# Altium PCB PCB3.PcbDoc
Units mil, origin at the board's own origin, x right, y up, seen from the top; angles counter-clockwise.
Board outline 6000 x 4000 mil, 2 copper layers (Top Layer, Bottom Layer); 76 components, 0 nets, 210 pads, 0 vias.
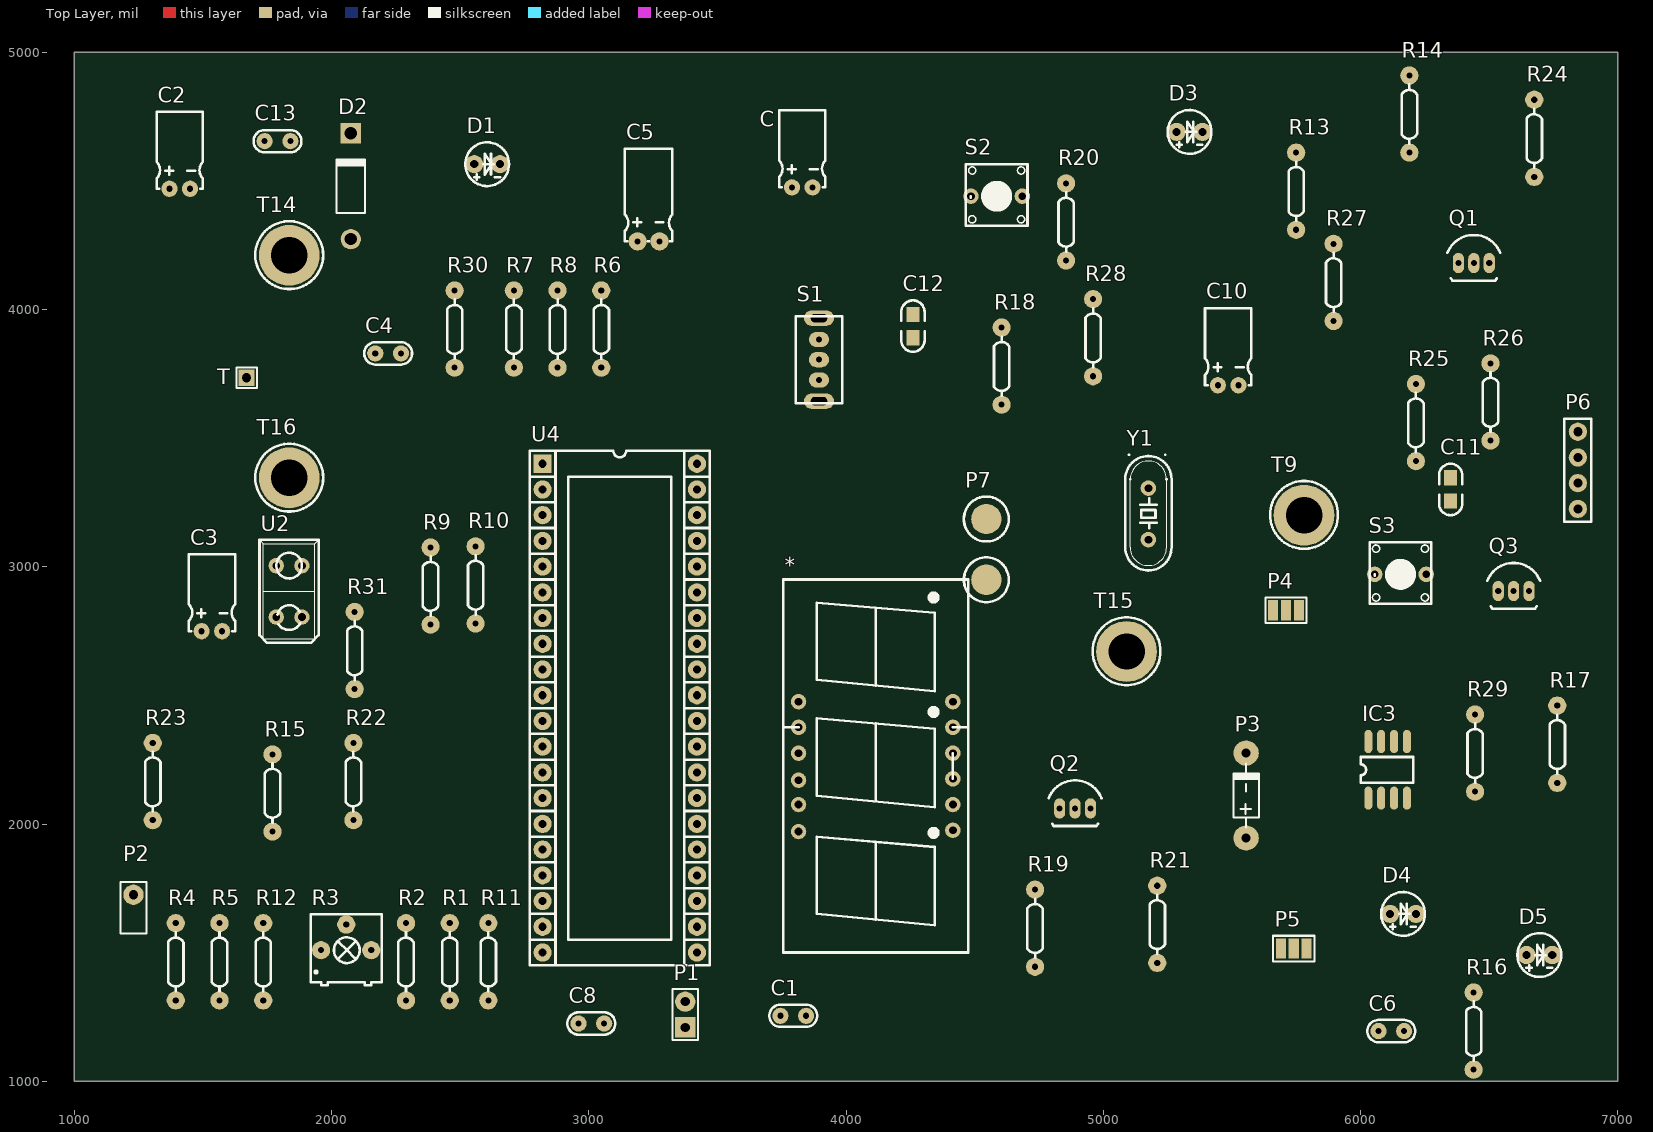
[diagram p0: Top Layer view]
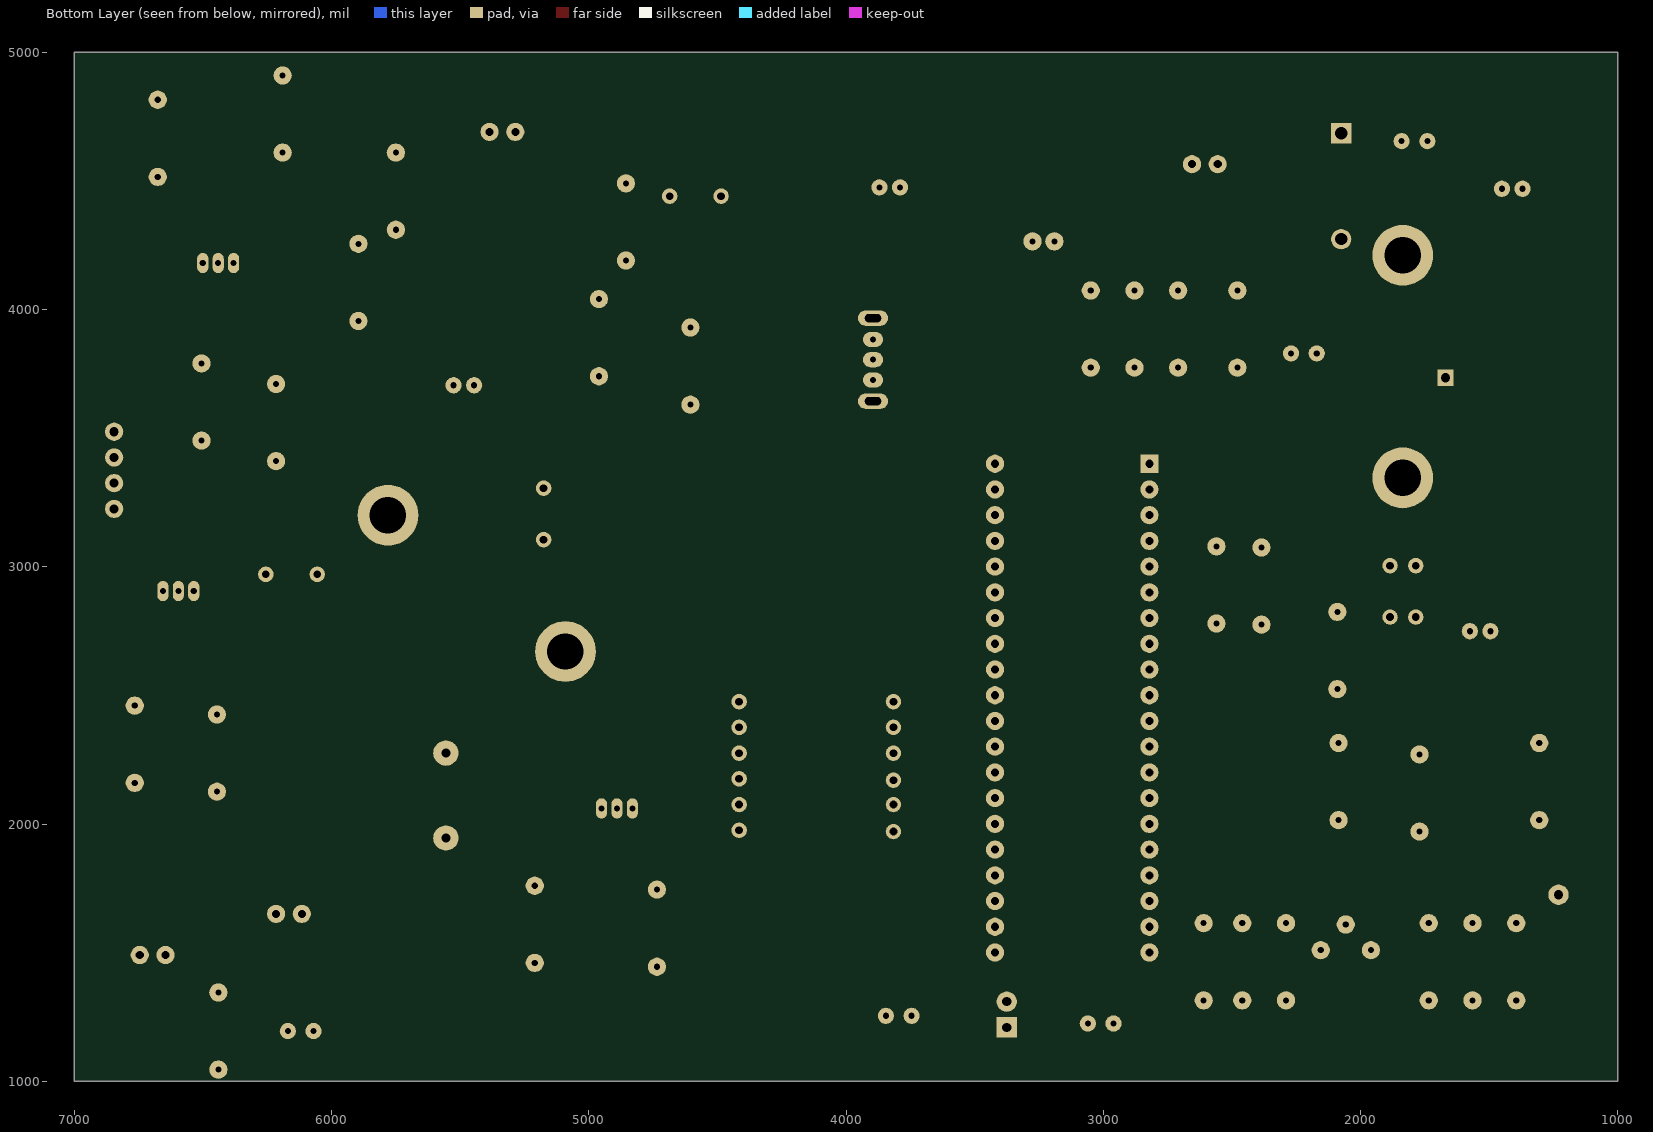
[diagram p1: Bottom Layer view, seen from below]

## Layer stack, top to bottom
Top Solder: solder mask 0.4, Solder Resist, Dk 3.5
Top Layer: signal copper 1.4
Dielectric 1: dielectric 12.6, FR-4, Dk 4.8
Bottom Layer: signal copper 1.4
Bottom Solder: solder mask 0.4, Solder Resist, Dk 3.5

## Board outline
1000,1000 7000,1000 7000,5000 1000,5000

## Design rules (kind name [scope] priority, off if disabled: settings)
Clearance [All] p1: gap=10 ignorepadtopadclearanceinfootprint=FALSE except(0: Arc-Hole Track-Hole SMDPad-Hole THPad-Hole Via-Hole Fill-Hole Poly-Hole Region-Hole Text-Hole)
PolygonConnect [All] p1: connectstyle=Relief reliefconductorwidth=10 reliefentries=4 polygonreliefangle="90 Angle" airgapwidth=10
RoomDefinition Sheet2 [InComponentClass('Sheet2')] p1: confinementstyle=ConfineIn formatcopy=TRUE lockcomponents=FALSE outline 7050.57,990.57 25795.57,990.57 25795.57,3110.57 7050.57,3110.57
RoutingVias [All] p1: holewidth=28 width=50 viastyle="Through Hole" minholewidth=28 minwidth=50 maxholewidth=28 maxwidth=50
SolderMaskExpansion [All] p1: expansion=4 istentingtop=FALSE
Width [All] p1: maxlimit=10 minlimit=10 preferedwidth=10
30 further rules are at their usual default settings.

## Components (designator, comment, footprint, x,y, rotation, side; value= is the part's Value field where it differs from the comment)
* "tt" smg 4355.57,2220.57 r90 top
C "Cap Pol1" cd-0.1t 3790,4475 r90 top value=10uF
C1 "Cap" C-0.1#1 3745,1254.43 r0 top value=30pF
C2 "Cap Pol1" cd-0.1t 1370,4469.43 r90 top value=0.47uF
C3 "Cap Pol1" cd-0.1t 1495,2749.43 r90 top value=0.47uF
C4 "Cap" C-0.1#1 2170,3829.43 r0 top value=104
C5 "Cap Pol1" CD-0.2T 3190,4265 r90 top value=100uF
C6 "Cap" C-0.1#1 6070,1195 r0 top value=104
C7 "Cap" C-0.1#2 1305.57,48.31 r0 top value=30pF
C8 "Cap" C-0.1#1 2960,1224.43 r0 top value=100pF
C10 "Cap Pol1" cd-0.1t 5445.57,3705.57 r90 top value=100pF
C11 "Cap" C0805R 6350.57,3255.57 r90 top value=100pF
C12 "Cap" C0805R 4260.57,3890.57 r90 top value=100pF
C13 "Cap" C-0.1#1 1740,4654.43 r0 top value=104
D1 "LED0" LED3 2555,4565 r0 top
D2 "Diode 1N4007" DO-41 2075,4479.43 r90 top
D3 "LED0" LED3 5285.57,4690.57 r0 top
D4 "LED0" LED3 6115.57,1650.57 r0 top
D5 "LED0" LED3 6645.57,1490.57 r0 top
IC3 "NY3P065" sop8 6120.57,2230.57 r90 top
P1 "Header 2" SIP2#1 3375,1209.43 r90 top
P2 "Header 2" SIP2#2 1230,1625 r90 top
P3 "Header 6" D-0.3 5555.57,1945.57 r90 top
P4 "Header 3" JUMP3 5760.57,2830.57 r0 top
P5 "Header 3" JUMP3 5790.57,1515.57 r0 top
P6 "Header 4" SIP4 6845,3225 r90 top
P7 "Header 2" BEEP2 4545.57,2949.35 r90 top
Q1 "2N3906" TO92C 6380.57,4180.57 r0 top
Q2 "2N3906" TO92C 4830.57,2060.57 r0 top
Q3 "2N3906" TO92C 6535.57,2905.57 r0 top
R1 "Res2" R-0.3 2459.43,1314.43 r90 top value=1K
R2 "Res2" R-0.3 2289.43,1314.43 r90 top value=300K
R3 "RPot" 3362P 1959.43,1509.43 r0 top value=10K
R4 "Res2" R-0.3 1394.43,1314.43 r90 top value=2K
R5 "Res2" R-0.3 1564.43,1314.43 r90 top value=30K
R6 "Res2" R-0.3 3048.67,3773.87 r90 top value=3K
R7 "Res2" R-0.3 2708.67,3773.87 r90 top value=3K
R8 "Res2" R-0.3 2878.67,3773.87 r90 top value=30K
R9 "Res2" R-0.3 2385,2775 r90 top value=180K
R10 "Res2" R-0.3 2560,2779.43 r90 top value=100K
R11 "Res2" R-0.3 2609.43,1314.43 r90 top value=300K
R12 "Res2" R-0.3 1734.43,1314.43 r90 top value=3K
R13 "" R-0.3 5750,4310 r90 top value=100
R14 "" R-0.3 6190,4610 r90 top value=100
R15 "Res2" R-0.3 1770.57,1970.57 r90 top value=1K
R16 "" R-0.3 6440,1045 r90 top value=100
R17 "" R-0.3 6765,2160 r90 top value=100
R18 "" R-0.3 4605,3630 r90 top value=100
R19 "" R-0.3 4735,1445 r90 top value=100
R20 "" R-0.3 4855.57,4190.57 r90 top value=100
R21 "" R-0.3 5210,1460 r90 top value=100
R22 "Res2" R-0.3 2085,2015 r90 top value=10K
R23 "Res2" R-0.3 1305,2015 r90 top value=10K
R24 "Res2" R-0.3 6675.57,4515.57 r90 top value=10K
R25 "Res2" R-0.3 6215.57,3410.57 r90 top value=1K
R26 "Res2" R-0.3 6505.57,3490.57 r90 top value=1K
R27 "" R-0.3 5895.57,3955.57 r90 top value=4.7K
R28 "" R-0.3 4960.57,3740.57 r90 top value=4.7K
R29 "" R-0.3 6445.57,2125.57 r90 top value=4.7K
R30 "Res2" R-0.3 2478.67,3773.87 r90 top value=180K
R31 "Res2" R-0.3 2090,2524.43 r90 top value=100K
S1 "SW-SPST" POW3 3895,3726.26 r90 top
S2 "SW-PB" key 4630.57,4455.57 r0 top
S3 "SW-PB" key 6200.57,2985.57 r0 top
T "TEST" SIP1 1670,3735 r90 top
T2 "TEST" SIP1 15835,1700 r0 top
T9 "TEST" HLS 5780.57,3200.57 r0 top
T13 "TEST" SIP1 23965.57,2960.57 r0 top
T14 "TEST" HLS 1835.57,4210.57 r0 top
T15 "TEST" HLS 5090.57,2670.57 r0 top
T16 "TEST" HLS 1835.57,3345.57 r0 top
T122 "TEST" SIP1 24185.57,2960.57 r90 top
T21122 "TEST" SIP1 23410,2875 r90 top
U2 "Optoisolator1" sen 1825,2834.43 r90 top
U4 "P89C51RC2BN/01" DIP40 2820.57,3400.57 r0 top
Y1 "XTAL" jz 5185.57,3210.57 r90 top

## Footprints (in the part's own frame and the unit in brackets; to place one, negate y for a bottom-side part, rotate by r counter-clockwise, add the part's x,y. Pads: shape width x height; smd on the part's side, far side on the other; paste and mask are expansions set on the pad)
3362P [mm]
  round 1.8 hole 0.6: 1(0,0) 2(2.484,2.54) 3(4.953,0)
  silkscreen extent -1.02,-3.44 5.98,3.56
BEEP2 [mm]
  round 3 smd: 1(0,0) 2(6,0)
  silkscreen extent -2.21,-2.22 8.21,2.22
C0805R [mil]
  rect 60x50 smd: 1(0,0) 2(90,0)
  silkscreen extent -55,-45 145,45
C-0.1#1 [mm]
  round 1.6 hole 0.6: 1(0,0) 2(2.54,0)
  silkscreen extent -1.09,-1.1 3.63,1.1
C-0.1#2 [mm]
  round 1.6 hole 0.6: 1(590.79,13.194) 2(593.33,13.194)
  silkscreen extent -1.09,-1.1 3.63,1.1
cd-0.1t [mm]
  round 1.6 hole 0.6: 1(0,0) 2(0,-2.032)
  silkscreen extent 0,-3.3 7.62,1.27
CD-0.2T [mm]
  round 1.8 hole 0.6: 1(0,0) 2(0,-2.159)
  silkscreen extent 0,-3.43 9.14,1.27
D-0.3 [mm] "Diode, Axial; Body 5.2 x 2.7 mm (LxDia. max), Lead Dia. 0.86 mm (max)"
  round 2.5 hole 0.9: 1(0,0) 2(8.382,0)
  silkscreen extent 1.02,-1.27 7.37,1.27
DIP40 [mm]
  rect 1.8x1.8 hole 0.8: 1(0,0)
  round 1.8 hole 0.8: 2(0,-2.54) 3(0,-5.08) 4(0,-7.62) 5(0,-10.16) 6(0,-12.7) 7(0,-15.24) 8(0,-17.78) 9(0,-20.32) 10(0,-22.86) 11(0,-25.4) 12(0,-27.94) 13(0,-30.48) 14(0,-33.02) 15(0,-35.56) 16(0,-38.1) 17(0,-40.64) 18(0,-43.18) 19(0,-45.72) 20(0,-48.26) 21(15.24,-48.26) 22(15.24,-45.72) 23(15.24,-43.18) 24(15.24,-40.64) 25(15.24,-38.1) 26(15.24,-35.56) 27(15.24,-33.02) 28(15.24,-30.48) 29(15.24,-27.94) 30(15.24,-25.4) 31(15.24,-22.86) 32(15.24,-20.32) 33(15.24,-17.78) 34(15.24,-15.24) 35(15.24,-12.7) 36(15.24,-10.16) 37(15.24,-7.62) 38(15.24,-5.08) 39(15.24,-2.54) 40(15.24,0)
  silkscreen extent -1.27,-49.53 16.51,1.27
DO-41 [mm] "Diode, Axial; Body 5.2 x 2.7 mm (LxDia. max), Lead Dia. 0.86 mm (max)"
  round 2 hole 1.2: 1(-5.23,0)
  rect 2x2 hole 1.2: 2(5.23,0)
  silkscreen extent -2.65,-1.41 2.75,1.4
HLS [mm]
  round 6 hole 3.6: 1(0,0)
  silkscreen extent -3.35,-3.32 3.35,3.37
JUMP3 [mm]
  rect 1x2 smd: 1(0,0) 2(-1.27,0) 3(-2.54,0)
  silkscreen extent -3.3,-1.27 0.76,1.27
jz [mil]
  round 60 hole 30: 1(-105,10) 2(95,10)
  silkscreen extent -225,-80 225,100
key [mil]
  round 60 hole 30: 1(-145,-15) 2(55,-15)
  silkscreen extent -165,-130 75,110
LED3 [mm]
  round 1.8 hole 0.8: 1(0,0) 2(2.54,0)
  silkscreen extent -0.89,-2.16 3.43,2.16
POW3 [mm]
  oval 1.5x3 hole 0.8 slot 1.6 at 90 deg: 0(-2.1,0) 0(6.1,0)
  oval 1.5x2 hole 0.6: 1(0,0) 2(2,0) 3(4,0)
  silkscreen extent -2.3,-2.3 6.3,2.3
R-0.3 [mm]
  round 1.8 hole 0.6: 1(0,0) 2(7.62,0)
  silkscreen extent 0.89,-0.76 6.73,0.75
sen [mil]
  round 60 hole 30: 1(-30,-60) 2(-30,40) 3(170,-60) 4(170,40)
  silkscreen extent -130,-125 270,105
SIP1 [mm]
  rect 1.6x1.6 hole 0.9: 1(0,0)
  silkscreen extent -1.02,-1.02 1.02,1.02
SIP2#1 [mm] "Connector; Header; 2 Position"
  rect 2x2 hole 0.9: 1(0,0)
  round 2 hole 0.9: 2(2.54,0)
  silkscreen extent -1.27,-1.27 3.81,1.27
SIP2#2 [mm] "Connector; Header; 2 Position"
  rect 2x2 hole 0.9: 1(13.194,-590.79)
  round 2 hole 0.9: 2(2.54,0)
  silkscreen extent -1.27,-1.27 3.81,1.27
SIP4 [mm]
  round 1.8 hole 0.9: 1(0,0) 2(2.54,0) 3(5.08,0) 4(7.62,0)
  silkscreen extent -1.27,-1.32 8.89,1.35
smg [mil]
  round 60 hole 30: 1(-245,-60) 2(-145,-60) 3(-45,-60) 4(55,-60) 5(155,-60) 6(255,-60) 7(255,540) 8(155,540) 9(55,540) 10(-50,540) 11(-145,540) 12(-250,540)
  silkscreen extent -720,-120 730,600
sop8 [mil]
  rrect100% 90x31 smd: 1(-130,90) 2(-130,40) 3(-130,-10) 4(-130,-60) 5(90,-60) 6(90,-10) 7(90,40) 8(90,90)
  silkscreen extent -70,-85 30,120
TO92C [mm]
  oval 1.1x2 hole 0.6: 1(0,0) 2(1.524,0) 3(3.048,0)
  silkscreen extent -1.09,-1.74 4.13,2.77

## Part data
C C2 C3 C5 C10: "Polarized Capacitor (Radial)", LatestRevisionDate=17-Jul-2002, LatestRevisionNote="Re-released for DXP Platform.", PackageDescription="Polarized Capacitor (Radial); 2 Leads", PackageReference=RB7.6-15, Published=8-Jun-2000, Publisher="Altium Limited"
C1 C4 C6 C7 C8 C11 C12 C13: "Capacitor", LatestRevisionDate=17-Jul-2002, LatestRevisionNote="Re-released for DXP Platform.", PackageDescription="Radial Cap, Thru-Hole; 2 Leads; 0.3 in Pin Spacing", PackageReference=RAD-0.3, Published=8-Jun-2000, Publisher="Altium Limited"
D1 D3 D4 D5: "Typical INFRARED GaAs LED", LatestRevisionDate=08-Jul-2005, LatestRevisionNote="Mech Layer 1 removed.", PackageDescription="LED; 2 Leads", PackageReference=LED-0, Published=8-Jun-2000, Publisher="Altium Limited"
D2: "1 Amp General Purpose Rectifier", Code_JEDEC=DO-204-AL, ComponentLink1Description="Manufacturer Link", ComponentLink1URL=http://www.fairchildsemi.com/, ComponentLink2Description=Datasheet, ComponentLink2URL=http://www.fairchildsemi.com/ds/1N%2F1N4001.pdf, DatasheetVersion=1998, LatestRevisionDate=17-Jul-2002, LatestRevisionNote="Re-released for DXP Platform.", PackageDescription="Diode, Axial; Body 5.2 x 2.7 mm (LxDia. max), Lead Dia. 0.86 mm (max)", PackageReference=DO-41, PackageVersion=Aug-1999, Published=8-Jun-2000, Publisher="Altium Limited"
IC3: library part SOUND
P1 P2 P7: "Header, 2-Pin", LatestRevisionDate=17-Jul-2002, LatestRevisionNote="Re-released for DXP Platform.", Publisher="Altium Limited"
P3: "Header, 6-Pin", LatestRevisionDate=17-Jul-2002, LatestRevisionNote="Re-released for DXP Platform.", Publisher="Altium Limited"
P4 P5: "Header, 3-Pin", LatestRevisionDate=17-Jul-2002, LatestRevisionNote="Re-released for DXP Platform.", Publisher="Altium Limited"
P6: "Header, 4-Pin", LatestRevisionDate=17-Jul-2002, LatestRevisionNote="Re-released for DXP Platform.", Publisher="Altium Limited"
Q1 Q2 Q3: "PNP General Purpose Amplifier", ComponentLink1Description="Manufacturer Link", ComponentLink1URL=http://www.fairchildsemi.com/, ComponentLink2Description=Datasheet, ComponentLink2URL=http://www.fairchildsemi.com/ds/2N%2F2N3906.pdf, DatasheetVersion=1997, LatestRevisionDate=15-Jan-2003, LatestRevisionNote="PCB Footprint 'BCY-W3/D4.7' replaced", PackageDescription="TO, Flat Index; 3 In-Line, Axial Leads; Body Dia. 4.5mm; Leads 0.51 x 0.48 mm (max)", PackageReference=TO-92A, PackageVersion=Sep-1998, Published=8-Jun-2000, Publisher="Altium Limited"
R1 R2 R4 R5 R6 R7 R8 R9 R10 R11 R12 R15 R22 R23 R24 R25 R26 R30 R31: "Resistor", LatestRevisionDate=17-Jul-2002, LatestRevisionNote="Re-released for DXP Platform.", PackageDescription="Axial Device, Thru-Hole; 2 Leads; 0.4 in Pin Spacing", PackageReference=AXIAL-0.4, Published=8-Jun-2000, Publisher="Altium Limited"
R3: "Potentiometer", LatestRevisionDate=17-Jul-2002, LatestRevisionNote="Re-released for DXP Platform.", PackageDescription="Variable Resistor, Thru-Hole; 3 Leads", PackageReference=VR5, Published=8-Jun-2000, Publisher="Altium Limited", Set Position=0.5, Sim Note="Enter the Resistance value and the set point into parameter fields."
R13 R14 R16 R17 R18 R19 R20 R21 R27 R28 R29: library part Res2, "Resistor", LatestRevisionDate=17-Jul-2002, LatestRevisionNote="Re-released for DXP Platform.", PackageDescription="Axial Device, Thru-Hole; 2 Leads; 0.4 in Pin Spacing", PackageReference=AXIAL-0.4, Published=8-Jun-2000, Publisher="Altium Limited"
S1: "Single-Pole, Single-Throw Switch", LatestRevisionDate=17-Jul-2002, LatestRevisionNote="Re-released for DXP Platform.", PackageDescription="Switch; 2 Leads", PackageReference=SPST-2, Published=24-Mar-1999, Publisher="Altium Limited"
S2 S3: "Switch", LatestRevisionDate=17-Jul-2002, LatestRevisionNote="Re-released for DXP Platform.", PackageDescription="Switch; 2 Leads", PackageReference=SPST-2, Published=24-Mar-1999, Publisher="Altium Limited"
U2: "4-Pin Phototransistor Optocoupler", DatasheetVersion=Nov-2003, LatestRevisionDate=04-Mar-2005, LatestRevisionNote="Sch pins 3 & 4 Swapped.", PackageReference=DIP-4, Published=24-Mar-1999, Publisher="Altium Limited"
U4: "80C51 8-Bit Flash Microcontroller Family, 32 kB ISP/IAP Flash with 512 B RAM.", Code_JEDEC=MO-015, ComponentLink1Description="Manufacturer Link", ComponentLink1URL=http://www-us2.semiconductors.philips.com/, ComponentLink2Description=Datasheet, ComponentLink2URL=http://www.semiconductors.philips.com/acrobat/datasheets/P89C51RA2_RB2_RC2_RD2_2.pdf, DatasheetVersion=18-Jul-2002, PackageDescription="DIP, Plastic; 40 Leads; Row Spacing 15.24 mm; Pitch 2.54 mm", PackageReference=SOT129-1, PackageVersion=Aug-2000, Published=21-May-2003, Publisher="Altium Limited"
Y1: "Crystal Oscillator", LatestRevisionDate=17-Jul-2002, LatestRevisionNote="Re-released for DXP Platform.", PackageDescription="Crystal, Thru-Hole; 2 Leads; Body 3.1 x 8.2 mm (Dia.xH)", PackageReference=R38, Published=8-Jun-2000, Publisher="Altium Limited"

## Nets (pads, with @x,y where several pads share a name; then routed paths per layer and width w, separated by ;. In a path a pad name is that pad's centre, name@x,y a point inside that pad or via, vN(x,y) a via of type N, cw(c..) or ccw(c..) an arc to the next point about the centre after c; other vN are vias at no path point)
pads on no net: *.1 *.2 *.3 *.4 *.5 *.6 *.7 *.8 *.9 *.10 *.11 *.12 C1.1 C1.2 C2.1 C2.2 C3.1 C3.2 C4.1 C4.2 C5.1 C5.2 C6.1 C6.2 C7.1 C7.2 C8.1 C8.2 C10.1 C10.2 C11.1 C11.2 C12.1 C12.2 C13.1 C13.2 C.1 C.2 D1.1 D1.2 D2.1 D2.2 D3.1 D3.2 D4.1 D4.2 D5.1 D5.2 IC3.1 IC3.2 IC3.3 IC3.4 IC3.5 IC3.6 IC3.7 IC3.8 P1.1 P1.2 P2.1 P2.2 P3.1 P3.2 P4.1 P4.2 P4.3 P5.1 P5.2 P5.3 P6.1 P6.2 P6.3 P6.4 P7.1 P7.2 Q1.1 Q1.2 Q1.3 Q2.1 Q2.2 Q2.3 Q3.1 Q3.2 Q3.3 R1.1 R1.2 R2.1 R2.2 R3.1 R3.2 R3.3 R4.1 R4.2 R5.1 R5.2 R6.1 R6.2 R7.1 R7.2 R8.1 R8.2 R9.1 R9.2 R10.1 R10.2 R11.1 R11.2 R12.1 R12.2 R13.1 R13.2 R14.1 R14.2 R15.1 R15.2 R16.1 R16.2 R17.1 R17.2 R18.1 R18.2 R19.1 R19.2 R20.1 R20.2 R21.1 R21.2 R22.1 R22.2 R23.1 R23.2 R24.1 R24.2 R25.1 R25.2 R26.1 R26.2 R27.1 R27.2 R28.1 R28.2 R29.1 R29.2 R30.1 R30.2 R31.1 R31.2 S1.0 S1.1 S1.2 S1.3 S2.1 S2.2 S3.1 S3.2 T2.1 T9.1 T13.1 T14.1 T15.1 T16.1 T122.1 T21122.1 T.1 U2.1 U2.2 U2.3 U2.4 U4.1 U4.2 U4.3 U4.4 U4.5 U4.6 U4.7 U4.8 U4.9 U4.10 U4.11 U4.12 U4.13 U4.14 U4.15 U4.16 U4.17 U4.18 U4.19 U4.20 U4.21 U4.22 U4.23 U4.24 U4.25 U4.26 U4.27 U4.28 U4.29 U4.30 U4.31 U4.32 U4.33 U4.34 U4.35 U4.36 U4.37 U4.38 U4.39 U4.40 Y1.1 Y1.2